# EAGLE board UniDie (EAGLE 9.1.0)
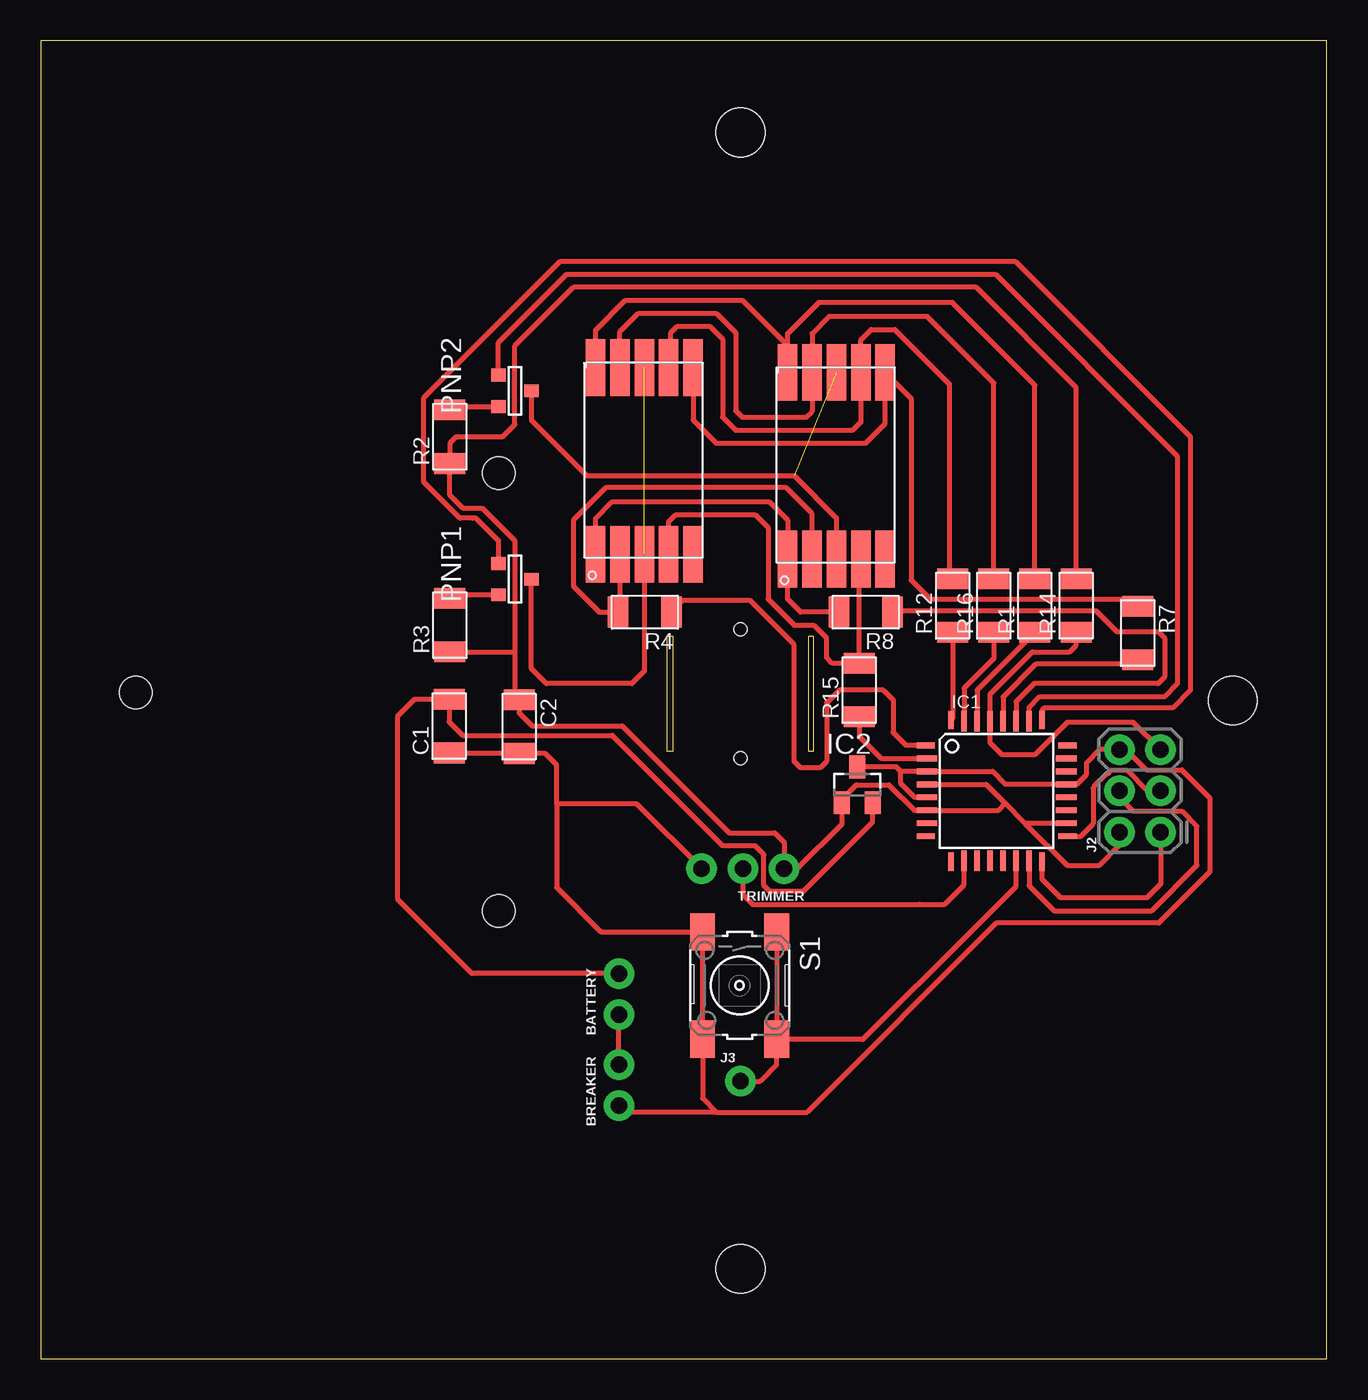
[diagram p0: board, top side]

Size 79.2 x 81.2 mm. Coordinates in mm from the lower left corner, seen from the top.
Outline: 0,0 79.2,0 79.2,81.2 0,81.2 0,0
Copper layers (1*16): Top 0.035mm / dielectric 1.5mm / Bottom 0.035mm
Design rules "default": minimum track width 6mil, minimum drill 0.35mm, track to track 6mil, track to pad 6mil, pad to pad 6mil, via to via 6mil, smd to smd 6mil, copper to edge 40mil, drill to drill 6mil, minimum pad ring 10mil, minimum via ring 8mil, stop-mask expansion 4mil, vias tented up to drill 0mil, thermal gap 10mil
Holes 3 mm at 43.1,75.55 73.4,40.55 43.1,5.55
Holes 2 mm at 5.85,41.05 28.2,54.55 28.2,27.6
Holes 0.8 mm at 43.1,44.95 43.1,37
Milling: area 38.5,37.5 to 39,44.5; area 47.2,37.5 to 47.6,44.5

## Footprints (pad centres in the part's own frame; a part is rotated, then mirrored left to right if it is on the bottom)
10-SMD = smd 1.2 x 3.5: 1-E 2.1,-9; 2-D 3.6,-9; 3 5.1,-9; 4-C 6.6,-9; 5-DP 8.1,-9; 6-B 8.1,2.5; 7-A 6.6,2.5; 8 5.1,2.5; 9-F 3.6,2.5; 10-G 2.1,2.5
1X02_NO_SILK = drill 1.016 pad 1.88: 1 0,0; 2 2.54,0
C1206FAB = smd 1.27 x 1.905: 1 -1.651,0; 2 1.651,0
TQFP32-08THIN = smd 1.118 x 0.356: 1 -4.369,2.8; 8 -4.369,-2.8; 17 4.369,-2.8; 24 4.369,2.8 | smd 1.27 x 0.356: 2 -4.293,2; 3 -4.293,1.2; 4 -4.293,0.4; 5 -4.293,-0.4; 6 -4.293,-1.2; 7 -4.293,-2; 18 4.293,-2; 19 4.293,-1.2; 20 4.293,-0.4; 21 4.293,0.4; 22 4.293,1.2; 23 4.293,2 | smd 0.356 x 1.118: 9 -2.8,-4.369; 16 2.8,-4.369; 25 2.8,4.369; 32 -2.8,4.369 | smd 0.356 x 1.27: 10 -2,-4.293; 14 1.2,-4.293; 15 2,-4.293; 26 2,4.293; 27 1.2,4.293; 31 -2,4.293 | smd 0.35 x 1.27: 11 -1.2,-4.293; 12 -0.4,-4.293; 13 0.4,-4.293; 28 0.4,4.293; 29 -0.4,4.293; 30 -1.2,4.293
SOT23 = smd 1 x 1.4: 1 -0.95,-1.1; 2 0.95,-1.1; 3 0,1.1
2X3-NS = drill 1.016 pad 1.88: 1 -2.54,-1.27; 2 -2.54,1.27; 3 0,-1.27; 4 0,1.27; 5 2.54,-1.27; 6 2.54,1.27
1X01_NO_SILK = drill 1.016 pad 1.88: 1 0,0
SOT-23 = smd 0.787 x 0.889: 1 0.025,-1.016; 2 -0.94,1.016; 3 0.991,1.016
R1206FAB = smd 1.27 x 1.905: 1 -1.651,0; 2 1.651,0
6MM_SWITCH = smd 2.286 x 1.524: 1 -3.302,2.286; 2 3.302,2.286; 3 -3.302,-2.286; 4 3.302,-2.286
1X03_NO_SILK = drill 1.016 pad 1.88: 1 0,0; 2 2.54,0; 3 5.08,0

## Placement (x,y rotation side)
7-SEG-LED1  [10-SMD]  43.9,58.26 0 top
7-SEG-LED2  [10-SMD]  32.07,58.56 0 top
BATTERY  [1X02_NO_SILK]  35.6,21.2 90 top
BREAKER  [1X02_NO_SILK]  35.6,15.6 90 top
C1  [C1206FAB]  25.16,38.97 90 top
C2  [C1206FAB]  29.47,38.94 270 top
IC1  ATMEGA88-THIN  [TQFP32-08THIN]  58.86,34.99 0 top
IC2  [SOT23]  50.28,35.36 0 top
J2  AVR_SPI_PROG_3X2NS  [2X3-NS]  67.69,34.99 90 top
J3  [1X01_NO_SILK]  43.1,17.1 0 top
PNP1  [SOT-23]  29.2,48 90 top
PNP2  [SOT-23]  29.2,59.6 90 top
R1  120ohm  [R1206FAB]  61.22,46.4 90 top
R2  1k  [R1206FAB]  25.2,56.8 90 top
R3  1k  [R1206FAB]  25.2,45.2 90 top
R4  120ohm  [R1206FAB]  37.2,46 180 top
R7  120ohm  [R1206FAB]  67.55,44.71 270 top
R8  120ohm  [R1206FAB]  50.8,46 180 top
R12  120ohm  [R1206FAB]  56.15,46.4 90 top
R14  10k  [R1206FAB]  63.76,46.4 90 top
R15  120ohm  [R1206FAB]  50.4,41.19 90 top
R16  120ohm  [R1206FAB]  58.69,46.4 90 top
S1  [6MM_SWITCH]  43.04,23 270 top
TRIMMER  [1X03_NO_SILK]  45.78,30.2 180 top

## Library data of the parts
7-SEG-LED1 7-SEG-LED2 = AG
BATTERY BREAKER J2 J3 TRIMMER = SparkFun-Connectors
C1 C2 IC1 IC2 PNP1 PNP2 R1-R4 R7 R8 R12 R14-R16 S1 = fab

## Nets
5V: C2.1 IC1.4 IC1.6 IC1.18 IC2.1 J2.2 R2.1 R3.1 R14.2 TRIMMER.1
DIG1: 7-SEG-LED1.3 7-SEG-LED1.8 PNP2.1
DIG2: 7-SEG-LED2.3 7-SEG-LED2.8 PNP1.1
GND: BREAKER.1 C1.1 C2.2 IC1.3 IC1.5 IC1.21 IC2.3 J2.6 S1.3 S1.4 TRIMMER.3
GT1: IC1.26 PNP2.3
GT2: IC1.25 PNP1.3
MISO: IC1.16 J2.1
MOSI: IC1.15 J2.4
N$1: BATTERY.2 C1.2 IC2.2
N$2: PNP1.2 R3.2
N$3: IC1.28 R7.2
N$4: IC1.27 R8.1
N$5: BATTERY.1 BREAKER.2
N$6: IC1.2 R15.1
N$7: IC1.1 R4.1
N$8: IC1.32 R12.1
N$9: IC1.31 R16.1
N$10: IC1.30 R1.1
N$13: PNP2.2 R2.2
RST: IC1.29 J2.5 R14.1
SCK: IC1.17 J2.3
SEG1: 7-SEG-LED1.1-E 7-SEG-LED2.1-E R8.2
SEG2: 7-SEG-LED1.2-D 7-SEG-LED2.2-D R4.2
SEG4: 7-SEG-LED1.4-C 7-SEG-LED2.4-C R15.2
SEG6: 7-SEG-LED1.6-B 7-SEG-LED2.6-B R7.1
SEG7: 7-SEG-LED1.7-A 7-SEG-LED2.7-A R12.2
SEG9: 7-SEG-LED1.9-F 7-SEG-LED2.9-F R16.2
SEG10: 7-SEG-LED1.10-G 7-SEG-LED2.10-G R1.2
SWT: IC1.14 J3.1 S1.1 S1.2
TRM: IC1.10 TRIMMER.2

## Tracks (layer width: path | path; a pad name or v marks a point on that pad's centre or on a via)
5V
  Top 0.305: IC1.4 58.21,35.39 59.4,34.2 | R14.2 63.76,59.84 57.6,66 32.8,66 29.2,62.4 29.2,57.55 28.45,56.8 25.6,56.8 25.2,56.4 R2.1 25.2,53.2 26,52.4 27.2,52.4 29.19,50.41 29.19,43.55 | 59.4,34.2 60.61,32.99 | 60.61,32.99 63.2,30.4 65.2,30.4 66.42,31.62 J2.2 | 59.4,34.2 58.99,33.79 IC1.6 53.81,33.79 52.23,35.37 50.23,35.37 49.33,34.47 IC2.1 49.33,32.93 46.6,30.2 TRIMMER.1 45.78,31.82 45.2,32.4 42.4,32.4 35.81,38.99 30.27,38.99 29.47,39.79 C2.1 29.19,40.87 29.19,43.55 | IC1.18 60.61,32.99 | R3.1 29.19,43.55
DIG1  (1 unrouted)
  Top 0.305: 7-SEG-LED1.3 49,51.8 46.4,54.4 33.63,54.4 30.22,57.82 PNP2.1
DIG2  (1 unrouted)
  Top 0.305: PNP1.1 30.22,42.52 31.14,41.6 36.4,41.6 37.17,42.37 7-SEG-LED2.3
GND
  Top 0.305: 41.6,15.2 40.75,16.05 S1.4 S1.3 34.5,26.3 31.76,29.03 31.76,34.19 | 41.6,15.2 47.2,15.2 58.85,26.85 68.85,26.85 72,30 72,34.55 70.27,36.28 68.07,36.28 66.82,37.53 J2.6 65.22,37.53 64.4,36.71 64.4,36 63.79,35.39 IC1.21 59.41,35.39 58.61,36.19 IC1.3 52.97,36.19 | IC1.5 53.81,34.59 52.97,35.43 52.97,36.19 | 52.97,36.19 52.7,36.46 IC2.3 | 31.76,34.19 36.71,34.19 TRIMMER.3 | 31.76,34.19 31.76,36.59 31.07,37.29 C2.2 25.19,37.29 C1.1 | BREAKER.1 36,15.2 41.6,15.2
GT1
  Top 0.305: PNP2.3 28.18,62.59 32.39,66.8 58.8,66.8 70,55.6 70,41.6 69.2,40.8 61.53,40.8 60.86,40.13 IC1.26
GT2
  Top 0.305: PNP1.3 28.18,50.41 26.8,51.79 26.58,51.79 25.81,51.79 23.6,54 23.6,59.2 32,67.6 60,67.6 70.8,56.8 70.8,41.2 69.7,40.1 61.8,40.1 61.66,39.96 IC1.25
MISO
  Top 0.305: IC1.16 61.66,29.54 62.8,28.4 68.11,28.4 68.96,29.25 J2.1
MOSI
  Top 0.305: IC1.15 60.86,29.14 62.4,27.6 68.4,27.6 71.2,30.4 71.2,32.8 70.25,33.74 67.27,33.74 66.42,34.59 J2.4
N$1
  Top 0.305: IC2.2 51.23,33.06 46.97,28.8 44.88,28.8 44.53,29.15 44.53,31.07 44,31.6 42,31.6 35.2,38.4 26,38.4 25.16,39.24 C1.2 23.02,40.62 22,39.6 22,28.3 26.56,23.74 BATTERY.2
N$2
  Top 0.305: R3.2 25.4,47.05 PNP1.2
N$3
  Top 0.305: IC1.28 59.26,40.78 61.28,42.8 67.29,42.8 R7.2
N$4
  Top 0.305: R8.1 52.54,46.09 64.98,46.09 66.27,44.8 68.8,44.8 69.2,44.4 69.2,42 68.8,41.6 61.18,41.6 60.06,40.48 IC1.27
N$5
  Top 0.305: BREAKER.2 BATTERY.1
N$6
  Top 0.305: IC1.2 51.75,36.99 50.4,38.34 R15.1
N$7
  Top 0.305: IC1.1 53.29,37.79 52.49,38.59 52.49,40.59 51.88,41.2 49.2,41.2 48.4,40.4 48.4,36.8 48,36.4 46.8,36.4 46.4,36.8 46.4,44 43.7,46.7 39.55,46.7 R4.1
N$8
  Top 0.305: R12.1 56.15,39.45 IC1.32
N$9
  Top 0.305: IC1.31 56.86,41.32 58.69,43.15 R16.1
N$10
  Top 0.305: R1.1 57.66,41.19 IC1.30
N$13
  Top 0.305: PNP2.2 25.2,58.66 R2.2
RST
  Top 0.305: J2.5 67.29,39.2 63.2,39.2 61.2,37.2 59.2,37.2 58.46,37.94 IC1.29 58.46,40.95 61.06,43.55 63.36,43.55 63.76,43.95 R14.1
SCK
  Top 0.305: IC1.17 64.03,32.19 64.8,32.96 64.8,35.14 64.86,35.2 64.86,35.26 65.6,36 65.67,36 65.9,36.23 66.94,36.23 68.18,34.99 J2.3
SEG1
  Top 0.305: 7-SEG-LED2.1-E 34.17,51.77 35.2,52.8 44.86,52.8 46,51.66 7-SEG-LED1.1-E 46,46.8 46.8,46 R8.2
SEG2
  Top 0.305: 7-SEG-LED1.2-D 47.5,52.06 45.9,53.66 34.8,53.66 32.8,51.66 32.8,47.6 34.4,46 35.67,46 | 7-SEG-LED2.2-D 35.67,47.2 | 35.67,46 35.67,46.8 35.67,47.2 | 35.67,46 R4.2 | 35.67,47.2 35.67,46
SEG4
  Top 0.305: 7-SEG-LED1.4-C 50.42,49.18 50.42,42.86 R15.2 48.76,42.84 48.4,43.2 48.4,44.4 47.6,45.2 46.4,45.2 44.8,46.8 44.8,51.2 44,52 39.11,52 38.67,51.56 7-SEG-LED2.4-C
SEG6
  Top 0.305: R7.1 67.55,46.76 54.8,46.76 53.6,47.96 53.6,59.16 7-SEG-LED1.6-B 52,57.6 50.8,56.4 41.6,56.4 40.17,57.83 7-SEG-LED2.6-B
SEG7
  Top 0.305: 7-SEG-LED2.7-A 38.8,61.19 38.8,63.2 39.2,63.6 41.2,63.6 42,62.8 42,58 42.8,57.2 50,57.2 50.5,57.7 7-SEG-LED1.7-A 50.5,62.76 51.14,63.4 52.6,63.4 55.95,60.05 55.95,48.29 56.15,48.09 R12.2
SEG9
  Top 0.305: 7-SEG-LED2.9-F 35.67,63.27 36.8,64.4 41.6,64.4 42.8,63.2 42.8,58.4 43.2,58 47.14,58 47.5,58.36 7-SEG-LED1.9-F 47.5,63.16 48.54,64.2 54.6,64.2 58.69,60.11 R16.2
SEG10
  Top 0.305: 7-SEG-LED2.10-G 34.17,63.37 36,65.2 43.2,65.2 46,62.4 7-SEG-LED1.10-G 46,63.16 47.9,65.06 56.14,65.06 61.22,59.98 R1.2
SWT
  Top 0.305: S1.1 S1.2 45.3,19.67 | 45.3,19.67 45.3,18.1 44.3,17.1 J3.1 | IC1.14 60.06,29.1 57.48,26.52 57.26,26.3 50.63,19.67 45.3,19.67
TRM
  Top 0.305: IC1.10 56.86,29.2 55.66,28 54.1,28 43.84,28 43.24,28.6 TRIMMER.2